# EAGLE board Jam Digital (EAGLE 7.7.0)
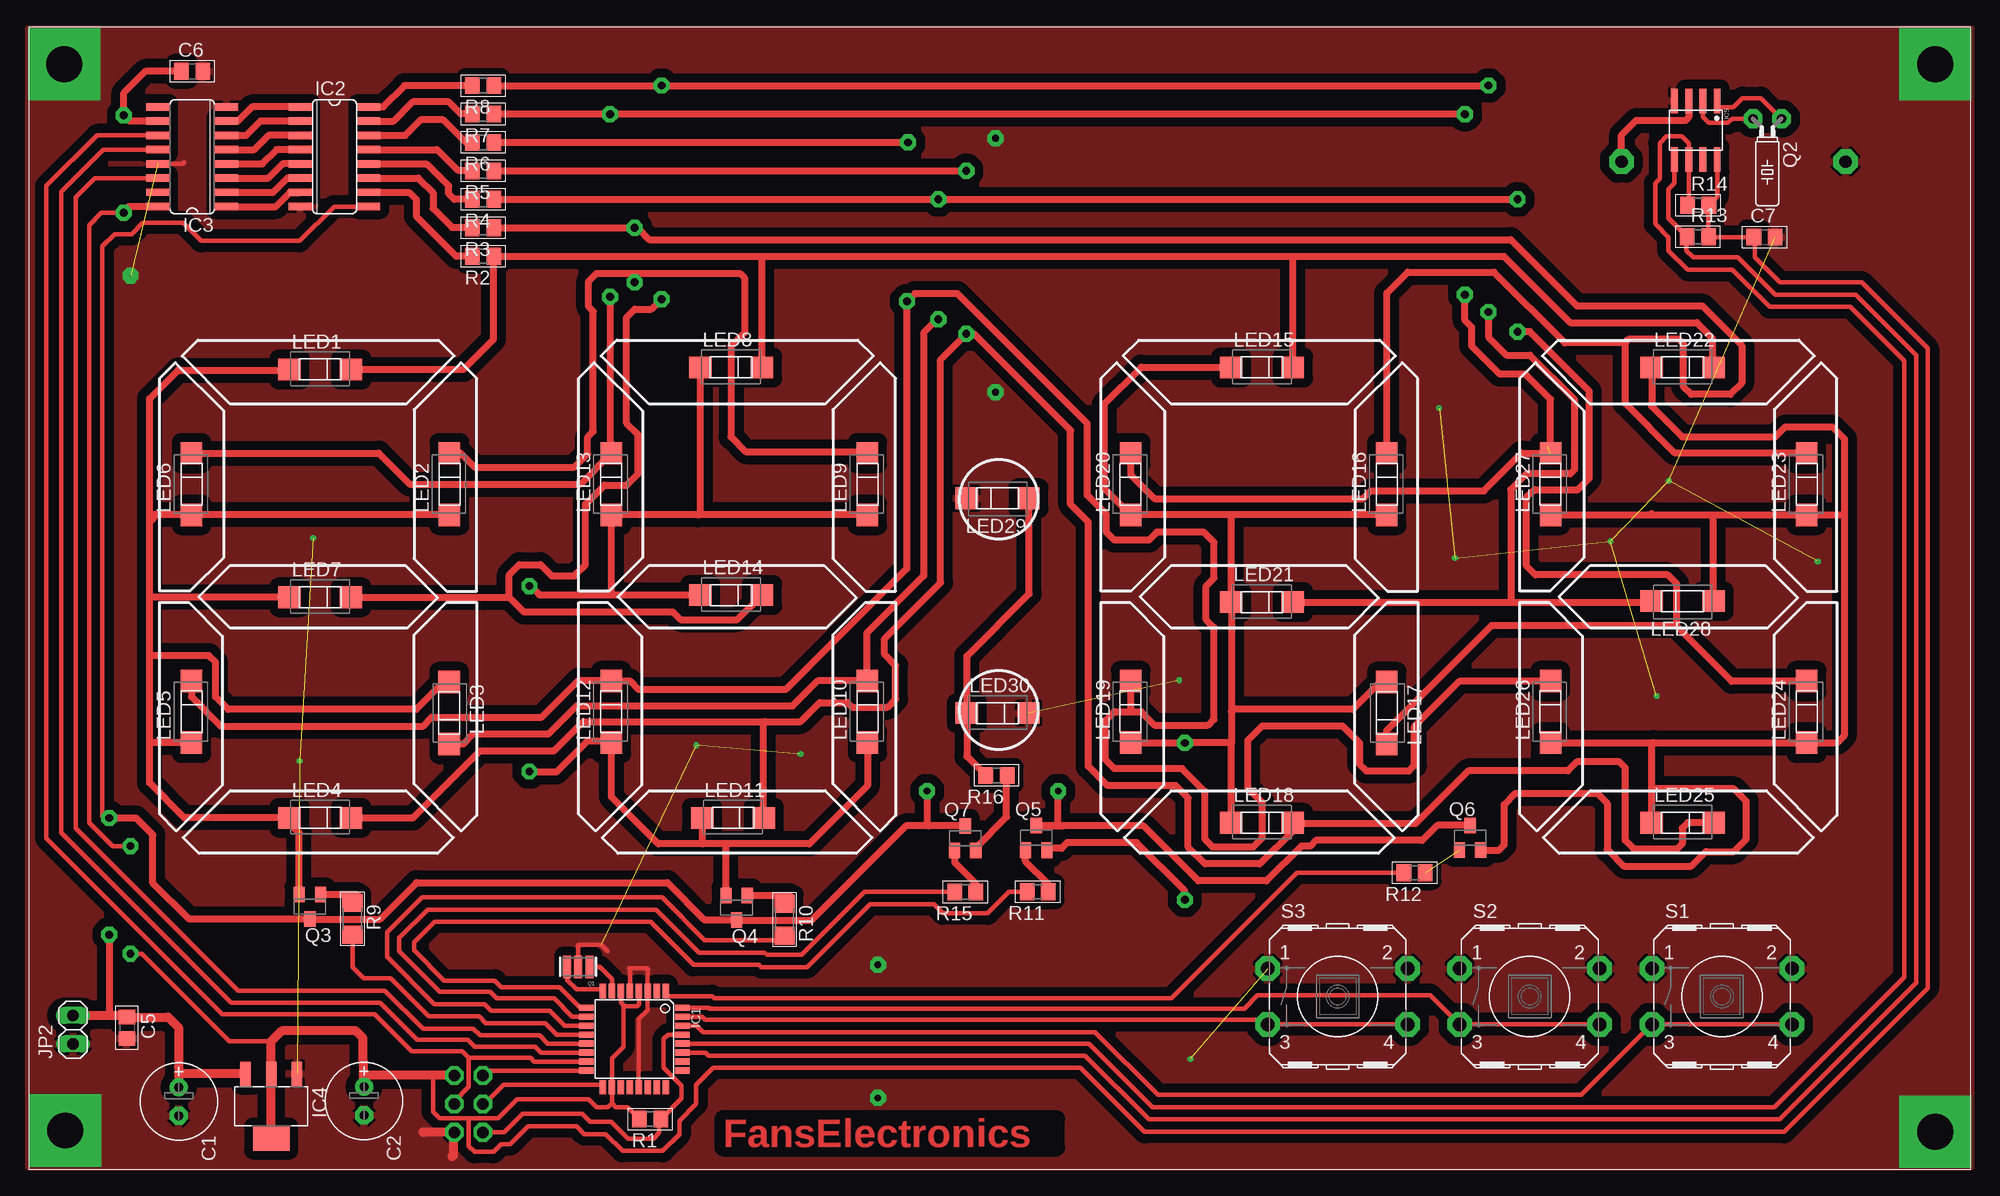
[diagram p0: board, top side]
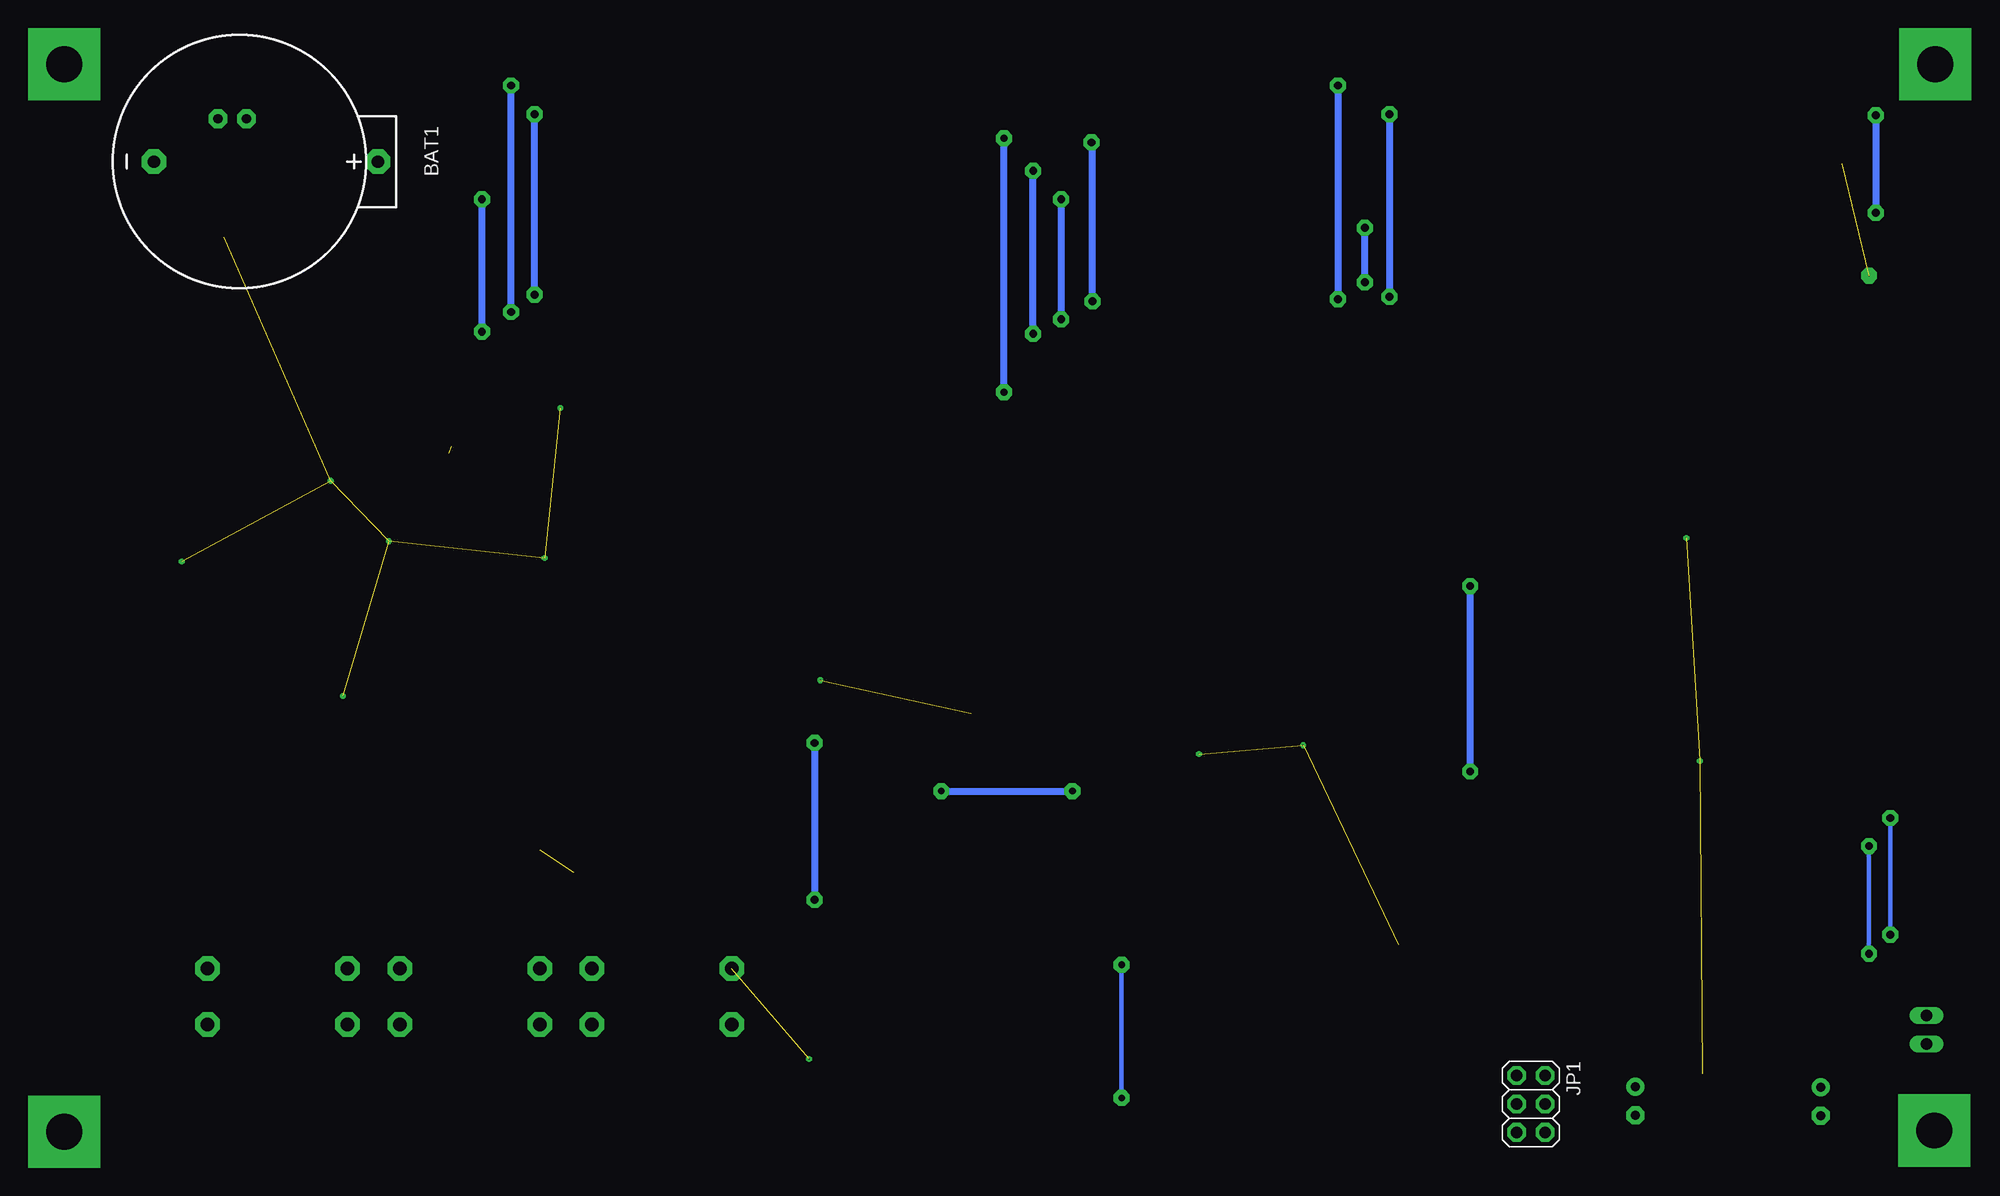
[diagram p1: board, bottom side, seen from below]

No outline drawn. Coordinates in mm, seen from the top.
Copper layers (1*16): Top 0.035mm / dielectric 1.5mm / Bottom 0.035mm
Design rules "default": minimum track width 10mil, minimum drill 24mil, track to track 8mil, track to pad 8mil, pad to pad 8mil, via to via 8mil, smd to smd 8mil, copper to edge 40mil, drill to drill 8mil, minimum pad ring 10mil, minimum via ring 8mil, stop-mask expansion 4mil, vias tented up to drill 0mil, thermal gap 10mil

## Footprints (pad centres in the part's own frame; a part is rotated, then mirrored left to right if it is on the bottom)
CR2032 = drill 1.1 pad 2.184 octagon: + 0,12.376; - 0,-7.624
E2,5-7 = drill 0.813 pad 1.6: + -1.27,0 | drill 0.813 pad 1.6 octagon: - 1.27,0
C0805 = smd 1.3 x 1.5: 1 -0.95,0; 2 0.95,0
TQFP32-08 = smd 1.27 x 0.559: 1 -4.293,2.8; 2 -4.293,2; 3 -4.293,1.2; 4 -4.293,0.4; 5 -4.293,-0.4; 6 -4.293,-1.2; 7 -4.293,-2; 8 -4.293,-2.8; 17 4.293,-2.8; 18 4.293,-2; 19 4.293,-1.2; 20 4.293,-0.4; 21 4.293,0.4; 22 4.293,1.2; 23 4.293,2; 24 4.293,2.8 | smd 0.559 x 1.27: 9 -2.8,-4.293; 10 -2,-4.293; 11 -1.2,-4.293; 12 -0.4,-4.293; 13 0.4,-4.293; 14 1.2,-4.293; 15 2,-4.293; 16 2.8,-4.293; 25 2.8,4.293; 26 2,4.293; 27 1.2,4.293; 28 0.4,4.293; 29 -0.4,4.293; 30 -1.2,4.293; 31 -2,4.293; 32 -2.8,4.293
SO16 = smd 0.66 x 2.032: 1 -4.445,-3.073; 2 -3.175,-3.073; 3 -1.905,-3.073; 4 -0.635,-3.073; 5 0.635,-3.073; 6 1.905,-3.073; 7 3.175,-3.073; 8 4.445,-3.073; 9 4.445,3.073; 10 3.175,3.073; 11 1.905,3.073; 12 0.635,3.073; 13 -0.635,3.073; 14 -1.905,3.073; 15 -3.175,3.073; 16 -4.445,3.073
TO232 = smd 0.95 x 2.15: 1 -2.3,-2.9; 2 0,-2.9; 3 2.3,-2.9 | smd 3.25 x 2.15: 4 0,2.9
SOIC8 = smd 0.61 x 2.21: 1 -1.905,-2.616; 2 -0.635,-2.616; 3 0.635,-2.616; 4 1.905,-2.616; 5 1.905,2.616; 6 0.635,2.616; 7 -0.635,2.616; 8 -1.905,2.616
2X03 = drill 1.016 pad 1.676 octagon: 1 -2.54,-1.27; 2 -2.54,1.27; 3 0,-1.27; 4 0,1.27; 5 2.54,-1.27; 6 2.54,1.27
1X02 = drill 1.016 long: 1 -1.27,0; 2 1.27,0
CHIPLED_5730 = smd 2 x 1.93: A -2.75,0.062; C 2.75,0.062
RESONATOR = smd 0.7 x 2: 1 -1,0; 2 0,0; 3 1,0
TC26H = drill 0.813 pad 1.676 octagon: 1 -1.27,-3.81; 2 1.27,-3.81
SOT23 = smd 1 x 1.4: 1 -0.95,-1.1; 2 0.95,-1.1; 3 0,1.1
R0805 = smd 1.3 x 1.5: 1 -0.95,0; 2 0.95,0
R1206 = smd 1.6 x 1.803: 1 -1.422,0; 2 1.422,0
TACT-12X12MM-O = drill 1.2 pad 2.184 octagon: 1 -6.248,2.489; 2 6.248,2.489; 3 -6.248,-2.489; 4 6.248,-2.489

## Placement (x,y rotation side)
BAT1  CR2032  [CR2032]  156.46,92.27 270 bottom
C1  47uf/25V  [E2,5-7]  15.31,8.41 270 top
C2  47uf/25V  [E2,5-7]  31.84,8.44 270 top
C5  100nf  [C0805]  10.68,14.99 270 top
C6  100nf  [C0805]  16.51,100.33 0 top
C7  100nf  [C0805]  156.84,85.54 0 top
IC1  MEGA8-AI  [TQFP32-08]  55.97,13.97 270 top
IC2  ULN2003-SO16  [SO16]  29.21,92.71 270 top
IC3  74HC595D  [SO16]  16.51,92.71 90 top
IC4  AMS11175V  [TO232]  23.57,7.99 180 top
IC5  DS1307-SMD  [SOIC8]  150.71,95.06 180 top
JP1  [2X03]  41.18,8.19 270 bottom
JP2  [1X02]  5.88,14.81 90 top
LED1  A  [CHIPLED_5730]  27.94,73.66 0 top
LED2  B  [CHIPLED_5730]  39.53,63.5 90 top
LED3  C  [CHIPLED_5730]  39.38,43.07 270 top
LED4  D  [CHIPLED_5730]  27.94,33.66 0 top
LED5  E  [CHIPLED_5730]  16.51,43.18 90 top
LED6  F  [CHIPLED_5730]  16.51,63.5 90 top
LED7  G  [CHIPLED_5730]  27.94,53.34 0 top
LED8  A  [CHIPLED_5730]  64.61,73.84 0 top
LED9  B  [CHIPLED_5730]  76.83,63.5 90 top
LED10  C  [CHIPLED_5730]  76.83,43.19 90 top
LED11  D  [CHIPLED_5730]  64.77,33.66 0 top
LED12  E  [CHIPLED_5730]  53.98,43.18 90 top
LED13  F  [CHIPLED_5730]  53.98,63.5 90 top
LED14  G  [CHIPLED_5730]  64.61,53.53 0 top
LED15  A  [CHIPLED_5730]  111.99,73.84 0 top
LED16  B  [CHIPLED_5730]  123.19,63.5 90 top
LED17  C  [CHIPLED_5730]  123.06,43.07 270 top
LED18  D  [CHIPLED_5730]  111.99,33.22 0 top
LED19  E  [CHIPLED_5730]  100.33,43.18 90 top
LED20  F  [CHIPLED_5730]  100.33,63.5 90 top
LED21  G  [CHIPLED_5730]  111.99,52.91 0 top
LED22  A  [CHIPLED_5730]  149.53,73.84 0 top
LED23  B  [CHIPLED_5730]  160.66,63.5 90 top
LED24  C  [CHIPLED_5730]  160.66,43.18 90 top
LED25  D  [CHIPLED_5730]  149.53,33.22 0 top
LED26  E  [CHIPLED_5730]  137.79,43.18 90 top
LED27  F  [CHIPLED_5730]  137.79,63.5 90 top
LED28  G  [CHIPLED_5730]  149.53,53.12 180 top
LED29  G  [CHIPLED_5730]  88.4,62.3 180 top
LED30  G  [CHIPLED_5730]  88.4,43 0 top
Q1  16Mhz  [RESONATOR]  50.97,20.43 180 top
Q2  32KHz  [TC26H]  157.09,92.28 180 top
Q3  BC847  [SOT23]  27.02,25.78 180 top
Q4  BC847  [SOT23]  65.1,25.7 180 top
Q5  BC847  [SOT23]  91.84,31.93 0 top
Q6  BC847  [SOT23]  130.56,31.94 0 top
Q7  BC847  [SOT23]  85.5,31.9 0 top
R1  10K  [R0805]  57.38,6.84 180 top
R2  220  [R0805]  42.48,83.82 180 top
R3  220  [R0805]  42.48,86.36 180 top
R4  220  [R0805]  42.48,88.9 180 top
R5  220  [R0805]  42.48,91.44 180 top
R6  220  [R0805]  42.48,93.98 180 top
R7  220  [R0805]  42.48,96.52 180 top
R8  220  [R0805]  42.48,99.06 180 top
R9  220  [R1206]  30.81,24.7 270 top
R10  220  [R1206]  69.39,24.64 270 top
R11  220  [R0805]  91.97,27.13 180 top
R12  220  [R0805]  125.61,28.81 180 top
R13  10K  [R0805]  150.9,85.58 0 top
R14  10K  [R0805]  150.91,88.38 0 top
R15  220  [R0805]  85.5,27.1 180 top
R16  220  [R0805]  88.3,37.5 180 top
S1  UP  [TACT-12X12MM-O]  153.03,17.78 0 top
S2  OK  [TACT-12X12MM-O]  135.89,17.78 0 top
S3  DOWN  [TACT-12X12MM-O]  118.75,17.78 0 top

## Library data of the parts
BAT1 = FansElectronics-Battery
C1 C2 C5-C7 R1-R16 = FansElectronics-RCL
IC1 = FansElectronics-Atmel; MPN: ATMEGA8-16AU; OC_FARNELL: 9171371; OC_NEWARK: 73M8863
IC2 = FansElectronics-IC-ULN
IC3 = FansElectronics-IC-74xx
IC4 = FansElectronics-VRegulator
IC5 = FansElectronics-RTC
JP1 JP2 = FansElectronics-Header
LED1-LED30 = FansElectronics-LED
Q1 Q2 = FansElectronics-Crystal
Q3-Q7 = transistor-npn
S1-S3 = FansElectronics-Switch

## Nets
+5V: C2.+ C6.1 C7.1 IC1.4 IC1.6 IC1.18 IC3.10 IC3.16 IC4.2 IC4.4 IC5.8 JP1.2 R1.2 R13.2 R14.2
+12V: C1.+ C5.1 IC2.9 IC4.3 JP2.2 Q3.3 Q4.3 Q5.3 Q6.3 Q7.3
A: LED1.C LED8.C LED15.C LED22.C R2.1
AS: IC1.24
ASD: IC1.2
ASDAS: IC1.26
B: LED2.C LED9.C LED16.C LED23.C R3.1
BU: IC1.23
BUTTON_DOWN: IC1.31 S3.3 S3.4
BUTTON_OK: IC1.32 S2.3 S2.4
BUTTON_UP: IC1.30 S1.3 S1.4
C: LED3.C LED10.C LED17.C LED24.C R4.1
D: LED4.C LED11.C LED18.C LED25.C R5.1
DATA: IC1.13 IC3.14
DFD: IC1.25
DIG1: IC1.12 R9.2
DIG2: IC1.11 R10.2
DIG3: IC1.9 R11.2
DIG4: IC1.1 R12.2
DISP_DIG1: LED1.A LED2.A LED3.A LED4.A LED5.A LED6.A LED7.A Q3.2
DISP_DIG2: LED8.A LED9.A LED10.A LED11.A LED12.A LED13.A LED14.A Q4.2
DISP_DIG3: LED15.A LED16.A LED17.A LED18.A LED19.A LED20.A LED21.A Q5.2
DISP_DIG4: LED22.A LED23.A LED24.A LED25.A LED26.A LED27.A LED28.A Q6.2
E: LED5.C LED12.C LED19.C LED26.C R6.1
F: LED6.C LED13.C LED20.C LED27.C R7.1
G: LED7.C LED14.C LED21.C LED28.C R8.1
GND: BAT1.- C1.- C2.- C5.2 C6.2 C7.2 IC1.3 IC1.5 IC1.21 IC2.8 IC3.8 IC3.13 IC4.1 IC5.4 JP1.6 JP2.1 LED29.C LED30.C Q1.2 S1.1 S1.2 S2.1 S2.2 S3.1 S3.2
LATCH: IC1.14 IC3.12
LED_BLINK: IC1.10 R15.2
MISO: IC1.16 JP1.1
MOSI: IC1.15 IC3.11 JP1.4
N$1: IC2.1 IC3.7
N$2: IC2.2 IC3.6
N$3: IC1.7 Q1.1
N$4: IC1.8 Q1.3
N$5: IC2.3 IC3.5
N$6: IC2.4 IC3.4
N$7: IC2.5 IC3.3
N$8: IC2.6 IC3.2
N$9: IC2.7 IC3.1
N$11: IC2.10 R2.2
N$12: Q7.1 R15.1
N$13: IC2.11 R3.2
N$14: IC2.12 R4.2
N$15: IC2.13 R5.2
N$16: IC2.14 R6.2
N$17: IC2.15 R7.2
N$18: IC2.16 R8.2
N$19: Q7.2 R16.1
N$20: IC5.2 Q2.2
N$21: IC5.1 Q2.1
N$25: Q3.1 R9.1
N$26: Q4.1 R10.1
N$27: Q5.1 R11.1
N$28: Q6.1 R12.1
N$29: LED29.A LED30.A R16.2
RESET: IC1.29 JP1.5 R1.1
SCK: IC1.17 JP1.3
SCL: IC1.28 IC5.6 R14.1
SDA: IC1.27 IC5.5 R13.1
VBAT: BAT1.+ IC5.3

## Tracks (layer width: path | path; a pad name or v marks a point on that pad's centre or on a via)
+5V  (via drill 0.7 pad 1.42)
  Top 0.406: v10.4,87.7 8.4,87.7 7.3,86.6 7.3,33.3 9.4,31.2 v11,31.2 | v11,21.6 12,21.6 19.83,13.77 23.57,13.77 | IC1.6 54.77,17.23 55.1,16.9 | 55.1,16.9 56.2,16.9 56.4,17.1 56.4,18.23 IC1.4 | 55.1,16.9 55,16.8 55,13.3 53.97,12.27 IC1.18 53.97,8.27 | IC5.8 152.61,89.12 R14.2 151.84,88.36 R13.2 151.88,85.54 C7.1 155.97,85.62 155.97,83.72 158.2,81.5 165.5,81.5 171.4,75.6 171.4,18.5 158.6,5.7 101.5,5.7 95.8,11.4 63,11.4 61.5,9.9 61.5,8.2 60,6.7 60,5.5 58.5,4 54.9,4 53.4,5.5 51.5,5.5 50.8,6.2 46.5,6.2 44.9,4.6 44.1,4.6 43.4,3.9 41.7,3.9 41.2,4.4 41.2,6.8 41.1,6.9 | 53.97,8.27 53.6,7.9 52.6,7.9 51.9,8.6 45.5,8.6 43.8,6.9 41.1,6.9 | 41.1,6.9 38.6,6.9 38,7.5 38,10.73 | 53.97,8.27 53.97,8.23 54.3,7.9 55.37,7.9 R1.2
  Top 0.61: C6.1 12.33,100.33 10.4,98.4 v10.4,96.4 10.91,95.89 IC3.10 | v10.4,87.7 10.4,87.8 10.87,88.27 IC3.16
  Top 0.813: IC4.4 IC4.2 23.57,13.77 24.5,14.7 31.1,14.7 31.76,14.04 31.76,12 31.8,11.96 31.8,11.4 31.8,10.7 | JP1.2 38,10.73 31.83,10.73 31.8,10.7 | C2.+ 31.8,9.71 31.8,10.7
  Bottom 0.406: v11,31.2 v11,21.6
  Bottom 0.61: v10.4,96.4 v10.4,87.7
+12V  (via drill 0.6 pad 1.42, 0.7 pad 1.42)
  Top 0.406: IC2.9 29.16,88.27 26.1,85.2 17.3,85.2 15.7,86.8 12.1,86.8 11.1,85.8 9.6,85.8 8.5,84.7 8.5,33.8 8.6,33.7 v9.1,33.7
  Top 0.61: Q6.3 127.64,33.04 126.3,31.7 116.8,31.7 116.3,31.2 115.5,31.2 112.4,28.1 106.3,28.1 101.4,33 93.8,33 | 93.8,33 91.87,33 Q5.3 94.33,33.03 93.8,33 | v9.1,23.3 9.1,16.38 9.4,16.08 | v9.1,33.7 11.5,33.7 13,32.2 13,27.9 16.22,24.68 Q3.3 33.28,24.68 36.52,27.93 58.92,27.93 62.25,24.6 Q4.3 | 65.02,24.68 Q4.3 | Q4.3 71.8,24.6 80.2,33 82.2,33 | Q7.3 82.2,33 | 93.8,33 v93.8,36.1 | v82.1,36.1 82.1,33.1 82.2,33
  Top 0.813: JP2.2 9.4,16.08 10.54,16.08 C5.1 14.36,15.94 15.3,15 15.3,11.47 15.3,11 | 15.3,11 C1.+ | IC4.3 15.3,10.89 15.3,11
  Bottom 0.406: v9.1,33.7 v9.1,23.3
  Bottom 0.61: v93.8,36.1 v82.1,36.1
A
  Top 0.61: 67.4,83.82 R2.1 43.4,83.8 43.4,76.4 40.72,73.72 LED1.C | 67.4,83.82 114.9,83.82 | LED8.C 67.36,83.78 67.4,83.82 | LED15.C 114.74,83.66 114.9,83.82 | 114.9,83.82 133.58,83.82 139.5,77.9 150.8,77.9 152.2,76.5 152.2,73.98 LED22.C
B  (via drill 0.7 pad 1.42)
  Top 0.61: 56,82.3 65.4,82.3 65.8,81.9 65.8,77 64.6,75.8 64.6,67.7 65.9,66.4 76.62,66.4 LED9.C | 56,82.3 v56,81.5 | LED2.C 40.45,66.25 41.7,65 50.6,65 51.8,66.2 51.8,67.7 52.3,68.2 52.3,78.9 51.9,79.3 51.9,81.6 52.6,82.3 56,82.3 | R3.1 v56,86.36 56.24,86.36 57.3,85.3 134.2,85.3 140.1,79.4 151.28,79.4 154.8,75.88 154.8,72.5 153.8,71.5 150.3,71.5 149.6,72.2 149.6,76 149.2,76.4 144.7,76.4 144.4,76.1 | LED16.C 123.13,80.53 125,82.4 132.7,82.4 139,76.1 144.4,76.1 | LED23.C 148.85,66.25 144.4,70.7 144.4,76.1
  Bottom 0.61: v56,81.5 v56,86.36
BUTTON_DOWN
  Top 0.406: S3.4 S3.3 112.09,15.7 62.3,15.7 62.03,15.97 IC1.31
BUTTON_OK
  Top 0.406: S2.4 S2.3 129.61,15.29 127,17.9 111.6,17.9 110.4,16.7 62.7,16.7 62.63,16.77 IC1.32
BUTTON_UP
  Top 0.406: IC1.30 61.53,15.17 62.1,14.6 97.1,14.6 102.7,9 140.5,9 S1.3 S1.4
C  (via drill 0.7 pad 1.42)
  Top 0.61: v134.8,88.9 v83.1,88.9 R4.1 | LED3.C 40.72,40.32 41.6,41.2 48.3,41.2 50.8,43.7 70.1,43.7 72.34,45.94 LED10.C 76.7,46.01 76.7,50.2 81.8,55.3 81.8,77 83,78.2 v83.1,78.2 | 149,50.8 149,54.6 148.2,55.4 136.4,55.4 135.6,56.2 135.6,62.3 136.3,63 140.2,63 141.2,64 141.2,71.8 135.9,77.1 v134.8,77.1 | LED24.C 160.56,45.9 153.9,45.9 149,50.8 | LED17.C 123.12,41.52 132.5,50.9 148.9,50.9 149,50.8
  Bottom 0.61: v83.1,88.9 v83.1,78.2 | v134.8,77.1 v134.8,88.9
D  (via drill 0.7 pad 1.42)
  Top 0.61: R5.1 v85.6,91.44 | LED4.C 36.22,33.72 42.2,39.7 48.8,39.7 51.4,42.3 67.6,42.3 | 67.6,42.3 70.8,42.3 72.5,44 75,44 75.4,43.6 78.6,43.6 79.3,44.3 79.3,47.3 78.3,48.3 78.3,49.7 83.3,54.7 83.3,74.6 v85.6,76.9 86.3,76.9 94.9,68.3 94.9,61.7 96.5,60.1 96.5,38.3 98.2,36.6 104.3,36.6 105.4,35.5 105.4,31.1 106.9,29.6 111.8,29.6 114.74,32.54 LED18.C 114.82,33.2 125.7,33.2 130.4,37.9 139.3,37.9 140.1,38.7 143.9,38.7 144.4,38.2 144.4,31.7 145.2,30.9 149,30.9 149.5,31.4 149.5,32.8 149.98,33.28 LED25.C | 67.5,33.74 LED11.C 67.52,42.22 67.6,42.3
  Bottom 0.61: v85.6,76.9 v85.6,91.44
DATA
  Top 0.406: IC3.14 7.8,90.81 6.1,89.1 6.1,32.8 20.6,18.3 33.7,18.3 37.1,14.9 41.6,14.9 42.2,14.3 47.5,14.3 48.23,13.57 IC1.13
DIG1
  Top 0.406: IC1.12 49.03,14.37 48,15.4 42.7,15.4 42.1,16 37.6,16 34.2,19.4 31.8,19.4 30.81,20.39 R9.2
DIG2
  Top 0.406: 69,22.8 62.25,22.8 58.42,26.62 37.02,26.62 33.9,23.5 33.9,21.3 38.1,17.1 42.6,17.1 43.2,16.5 48.4,16.5 49.73,15.17 IC1.11
  Top 0.61: R10.2 69.39,23.18 69,22.8
DIG3
  Top 0.406: R11.2 89.43,27.13 87.5,25.2 83.5,25.2 82.7,26 77,26 71.4,20.4 67.3,20.4 67.1,20.6 61.25,20.6 57.42,24.43 38.12,24.43 36.3,22.6 36.3,21.9 39,19.2 43.5,19.2 44.1,18.6 49.3,18.6 51.13,16.77 IC1.9
DIG4
  Top 0.406: IC1.1 58.77,17.83 58.8,17.8 62.9,17.8 63.1,17.6 103.9,17.6 115.11,28.81 R12.2
DISP_DIG1
  Top 0.61: LED4.A 24.7,33.72 | 24.7,33.72 15.81,33.72 12.7,36.83 12.7,40.64 | 12.7,40.64 12.7,48.3 | 12.7,48.3 12.7,53.34 | 12.7,53.34 12.7,60.1 | 12.7,60.1 12.7,60.96 | 12.7,60.96 12.7,71.12 15.24,73.66 25.13,73.66 LED1.A | LED6.A 12.91,60.75 12.7,60.96 | LED7.A 12.76,53.4 12.7,53.34 | LED5.A 12.91,40.43 12.7,40.64 | LED3.A 38.92,45.82 36.5,43.4 19.7,43.4 18.6,44.5 18.6,47.6 18,48.2 12.8,48.2 12.7,48.3 | LED2.A 13.35,60.75 12.7,60.1 | Q3.2 26.07,32.35 24.7,33.72
DISP_DIG2  (via drill 0.7 pad 1.42)
  Top 0.61: LED10.A 76.76,36.56 71.6,31.4 64.3,31.4 | v46.6,54.4 46.7,54.4 47.5,53.6 54.1,53.6 | 54.1,53.6 LED14.A | 54.1,53.6 53.91,53.79 LED13.A 61.7,60.75 | LED9.A 61.7,60.75 | LED8.A 61.85,60.91 61.7,60.75 | 64.3,31.4 62.1,31.4 | 62.1,31.4 58.1,31.4 53.91,35.59 LED12.A 53.74,40.6 51.8,40.6 49.05,37.85 | LED11.A 62.02,31.48 62.1,31.4 | v46.6,37.85 49.05,37.85 | 49,37.8 49.05,37.85 | Q4.2 64.15,31.25 64.3,31.4
  Bottom 0.61: v46.6,37.85 v46.6,54.4
DISP_DIG3  (via drill 0.7 pad 1.42)
  Top 0.61: LED15.A 109.22,73.92 101.22,73.92 97.9,70.6 97.9,63.12 LED20.A 109.1,60.75 | LED16.A 109.1,60.75 | LED17.A 122.52,45.82 120.1,43.4 109.44,43.4 109.24,43.2 | LED19.A 100.3,40.4 v105.1,40.4 109.14,40.4 109.24,40.3 | 109.24,43.2 LED21.A 109.24,60.61 109.1,60.75 | 109.24,43.2 109.24,40.3 | LED18.A 109.24,40.3 | v105.1,26.4 105.1,27.2 100.8,31.5 94.6,31.5 94.1,31 92.96,31 Q5.2
  Bottom 0.61: v105.1,40.4 v105.1,26.4
DISP_DIG4
  Top 0.61: LED27.A 146.88,60.75 | 146.88,60.75 152.5,60.75 | 152.5,60.75 LED23.A 163.95,60.75 164,60.7 | 164,60.7 164,41.1 163.33,40.43 LED24.A 160.56,40.4 159,40.4 158.97,40.43 146.9,40.43 | LED28.A 152.28,60.52 152.5,60.75 | 146.78,60.85 146.88,60.75 | LED22.A 146.78,70.42 149.5,67.7 157.8,67.7 158.7,68.6 162.9,68.6 164,67.5 164,60.7 | LED26.A 146.9,40.43 | LED25.A 146.78,36.2 | 146.78,36.2 146.78,40.3 146.9,40.43 | Q6.2 133.14,30.84 133.6,31.3 133.6,34.9 134.6,35.9 141.9,35.9 142.8,35 142.8,30.9 144.3,29.4 150.3,29.4 151.6,30.7 154.1,30.7 155.2,31.8 155.2,35.2 154.1,36.3 146.88,36.3 146.78,36.2
E  (via drill 0.7 pad 1.42)
  Top 0.61: R6.1 v80.4,93.98 | LED5.C 16.45,44.51 19.05,41.91 37.11,41.91 37.9,42.7 47.7,42.7 51,46 53.84,46 LED12.C 55.57,45.93 56.3,45.2 69.53,45.2 80.22,55.9 80.3,55.9 v80.3,79.8 81,80.5 84.8,80.5 96.4,68.9 96.4,62.5 98.1,60.8 98.1,59.2 98.8,58.5 101.9,58.5 102.6,59.2 106.8,59.2 107.7,58.3 107.7,55.1 107,54.4 107,51.4 107.7,50.7 107.7,42.5 107.2,42 102.4,42 101.2,43.2 100.5,43.2 | LED26.C 137.7,45.9 129.6,45.9 125.6,41.9 125.6,38.4 125.1,37.9 121.3,37.9 120.7,38.5 120.7,40.4 119.2,41.9 112,41.9 110.7,40.6 110.7,36.4 112,35.1 112,31.9 111.2,31.1 107.6,31.1 106.9,31.8 106.9,36.05 104.85,38.1 98.8,38.1 98,38.9 98,42.4 98.8,43.2 100.5,43.2 | LED19.C 100.27,43.43 100.5,43.2
  Bottom 0.61: v80.3,79.8 80.3,93.88 v80.4,93.98
F  (via drill 0.7 pad 1.42)  (1 unrouted)
  Top 0.61: LED6.C 33.15,66.25 35.9,63.5 51.16,63.5 53.8,66.14 | 53.8,66.14 LED13.C | R7.1 53.78,96.52 v53.8,96.5 v130.1,96.5 | v53.8,80.2 53.8,66.14 | LED20.C 100.27,64.33 102.4,62.2 121,62.2 121.7,62.9 131.8,62.9 135.15,66.25 136.88,66.25 137.5,66.88 | LED27.C 137.73,71.07 135.5,73.3 133.2,73.3 130.7,75.8 130.7,77.5 130.1,78.1 v130.1,80.4
  Bottom 0.61: v53.8,96.5 v53.8,80.2 | v130.1,80.4 v130.1,96.5
G  (via drill 0.7 pad 1.42)
  Top 0.61: R8.1 v58.4,99.06 v132.2,99.06 | LED7.C 44.8,53.4 | 44.8,53.4 46.1,52.1 59.4,52.1 60.1,51.4 65.16,51.4 LED14.C | 44.8,53.4 44.8,55.4 45.7,56.3 47.6,56.3 48.6,55.3 50.6,55.3 51.6,56.3 51.6,61.7 53.3,63.4 55.3,63.4 56.3,64.4 56.3,67.9 55.3,68.9 55.3,78.4 56,79.1 57.5,79.1 v58.4,80 | LED21.C 134.1,52.97 | 134.1,52.97 146.69,52.97 LED28.C | v132.2,78.85 132.2,76.6 133.8,75 135.9,75 139.9,71 139.9,64.8 139.5,64.4 135.6,64.4 134.2,63 134.2,53.07 134.1,52.97
  Bottom 0.61: v58.4,99.06 v58.4,80 | v132.2,78.85 v132.2,99.06
GND  (via drill 0.1, 0.1 pad 1.42, 0.6 pad 1.42, 3.2 pad 6.45)  (13 unrouted)
  Top 0.406: IC3.13 15.68,92.08 15.8,92.2 | Q1.2 50.97,22.36 51,22.4 53,22.4 53.6,21.8 | IC1.5 55.57,20.23 55.5,20.3 57.1,20.3 57.2,20.2 57.17,20.17 IC1.3 57.17,16.57 56.37,15.77 IC1.21
  Top 0.813: JP1.6 37.15,5.65 37.1,5.7 39.8,5.7 39.8,3.6 39.7,3.5
  Bottom 0.406: v77.7,20.6 v77.7,8.72
  Bottom 0.61: v88.2,71.7 v88.2,94.35
  other vias: 5.08,100.97 172.09,100.97 172.09,5.71 5.18,5.82 11,82.1 27.3,58.7 26.1,38.8 61.5,40.2 70.8,39.4 129.2,56.9 127.8,70.3 148.3,63.8 143.1,58.4 147.2,44.6 161.6,56.6 104.6,46 105.6,12.2
  pour Top (isolate 0.813): 1.91,104.14 175.26,104.14 175.26,2.54 1.91,2.54
LATCH
  Top 0.406: IC3.12 8.54,93.34 4.8,89.6 4.8,32.4 20,17.2 33.3,17.2 36.6,13.9 41.1,13.9 41.7,13.3 47.1,13.3 47.63,12.77 IC1.14
LED_BLINK
  Top 0.406: R15.2 76.5,27.1 70.9,21.5 67.8,21.5 67.6,21.7 61.75,21.7 57.92,25.52 37.52,25.52 35,23 35,21.8 38.6,18.2 43.1,18.2 43.7,17.6 48.8,17.6 50.43,15.97 IC1.10
MISO
  Top 0.406: IC1.16 42.89,11.17 JP1.1
MOSI
  Top 0.406: IC3.11 8.02,94.61 3.5,90.1 3.5,31.9 19.2,16.2 32.8,16.2 36.1,12.9 40.6,12.9 41.2,12.3 | JP1.4 39.91,8.41 41.2,9.7 41.2,12.3 | IC1.15 47.03,11.97 46.7,12.3 41.2,12.3
N$1
  Top 0.61: IC2.1 21.86,97.16 20.59,95.89 IC3.7
N$2
  Top 0.61: IC3.6 21.32,94.61 22.59,95.89 IC2.2
N$3
  Top 0.406: Q1.1 52.88,20.43 53.97,19.33 IC1.7
N$4
  Top 0.406: Q1.3 49.97,19.23 50.8,18.4 53.03,18.4 IC1.8
N$5
  Top 0.61: IC2.3 23.32,94.61 22.05,93.34 IC3.5
N$6
  Top 0.61: IC3.4 22.77,92.08 24.05,93.34 IC2.4
N$7
  Top 0.61: IC3.3 23.3,90.81 24.57,92.08 IC2.5
N$8
  Top 0.61: IC2.6 25,90.81 23.73,89.53 IC3.2
N$9
  Top 0.61: IC3.1 23.96,88.27 25.2,89.5 26.1,89.5 IC2.7
N$11
  Top 0.61: IC2.10 35.87,89.53 36.5,88.9 36.5,87.4 40.08,83.82 R2.2
N$12
  Top 0.61: R15.1 86.45,27.85 84.55,29.75 Q7.1
N$13
  Top 0.61: IC2.11 36.7,90.81 38,89.5 38,88.1 39.7,86.4 41.48,86.4 R3.2
N$14
  Top 0.61: IC2.12 37.42,92.08 39.4,90.1 39.4,89.4 39.9,88.9 R4.2
N$15
  Top 0.61: IC2.13 38.35,93.34 40.2,91.5 41.47,91.5 R5.2
N$16
  Top 0.61: R6.2 40.92,93.98 38.9,96 36.9,96 35.52,94.61 IC2.14
N$17
  Top 0.61: R7.2 40.48,96.52 39.4,97.6 36.2,97.6 34.48,95.89 IC2.15
N$18
  Top 0.61: IC2.16 33.55,97.16 35.46,99.06 R8.2
N$19
  Top 0.61: Q7.2 86.45,31.05 89.2,33.8 89.2,37.45 R16.1
N$20
  Top 0.406: Q2.2 153.94,96.09 153.57,95.72 151.88,95.72 151.34,96.26 IC5.2
N$21
  Top 0.406: IC5.1 152.61,97.16 152.57,97.12 154.07,97.12 154.88,97.92 156.53,97.92 Q2.1
N$25
  Top 0.61: Q3.1 31.22,26.88 31.4,26.7 31.38,26.7 R9.1
N$26
  Top 0.61: Q4.1 69.8,26.8 69.9,26.7 69.9,26.57 R10.1
N$27
  Top 0.61: R11.1 92.92,27.78 90.9,29.8 Q5.1
N$28  (1 unrouted)
N$29
  Top 0.61: LED29.A 91.2,62.19 91.2,53.7 85.65,48.15 LED30.A 85.65,39.2 R16.2
RESET
  Top 0.406: JP1.5 44.35,5.65 46,7.3 51.3,7.3 52,6.6 53.9,6.6 55.4,5.1 57.7,5.1 58.2,5.6 58.2,6.71 R1.1 60.2,8.7 60.2,9.8 58.6,11.4 58.6,14 58.97,14.37 IC1.29
SCK
  Top 0.406: JP1.3 42.59,8.19 44.3,9.9 52.95,9.9 IC1.17
SCL
  Top 0.406: R14.1 150.07,88.48 IC5.6 150.07,93.93 149.47,94.53 148.07,94.53 147.47,93.92 147.47,90.72 147.07,90.33 147.07,86.72 148.28,85.53 148.28,84.33 149.97,82.62 153.97,82.62 157.3,79.3 164.5,79.3 169.3,74.5 169.3,19.5 157.7,7.9 102.2,7.9 96.53,13.57 IC1.28
SDA
  Top 0.406: IC5.5 148.8,90.35 148.28,89.83 148.28,87.25 | 148.28,87.25 R13.1 | 148.28,87.25 148.28,87.22 149.88,85.62 149.88,84.33 150.47,83.72 154.47,83.72 157.8,80.4 165,80.4 170.4,75 170.4,19 158.2,6.8 101.9,6.8 96.2,12.5 62.6,12.5 62.33,12.77 IC1.27
VBAT
  Top 0.61: IC5.3 150.07,96.22 149.78,95.92 145.38,95.92 144.08,94.63 BAT1.+

## Text on the board
Top: FansElectronics